# Altium PCB board1.PcbDoc
Units mil, origin at the board's own origin, x right, y up, seen from the top; angles counter-clockwise.
Board outline 3500 x 2000 mil, 2 copper layers (Top Layer, Bottom Layer), stack 61.756 mil thick; 22 components, 12 nets, 57 pads, 12 vias.
Unrouted connection lines stored in the file: 12.
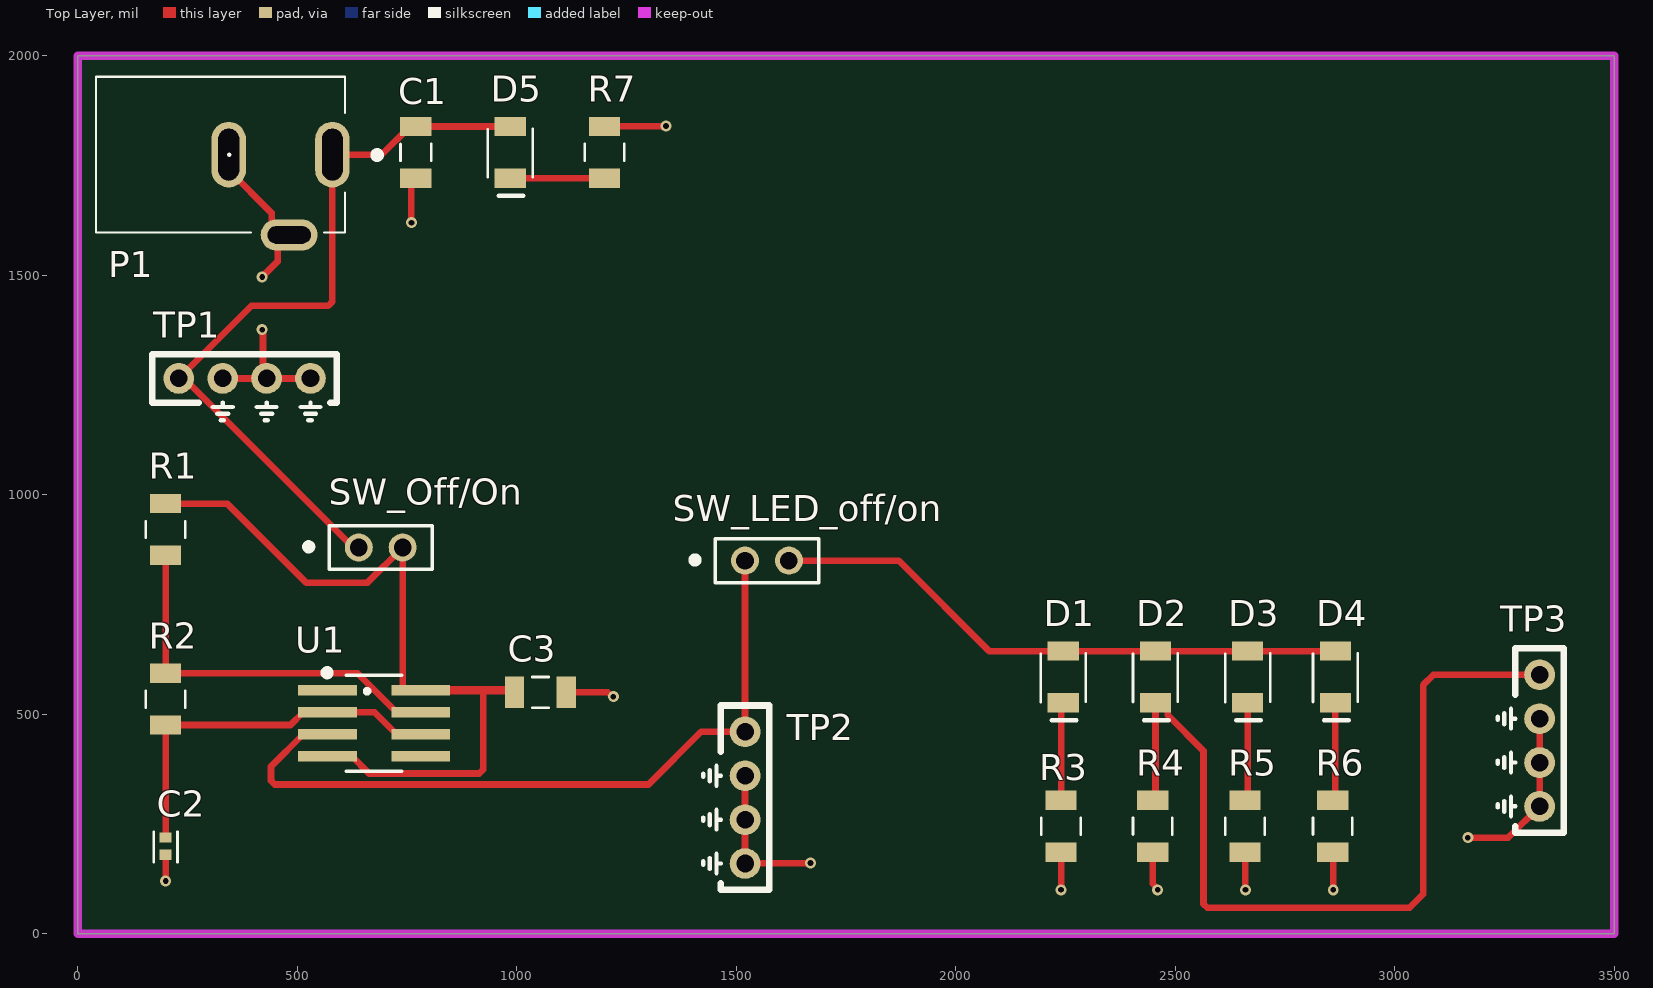
[diagram p0: Top Layer view]
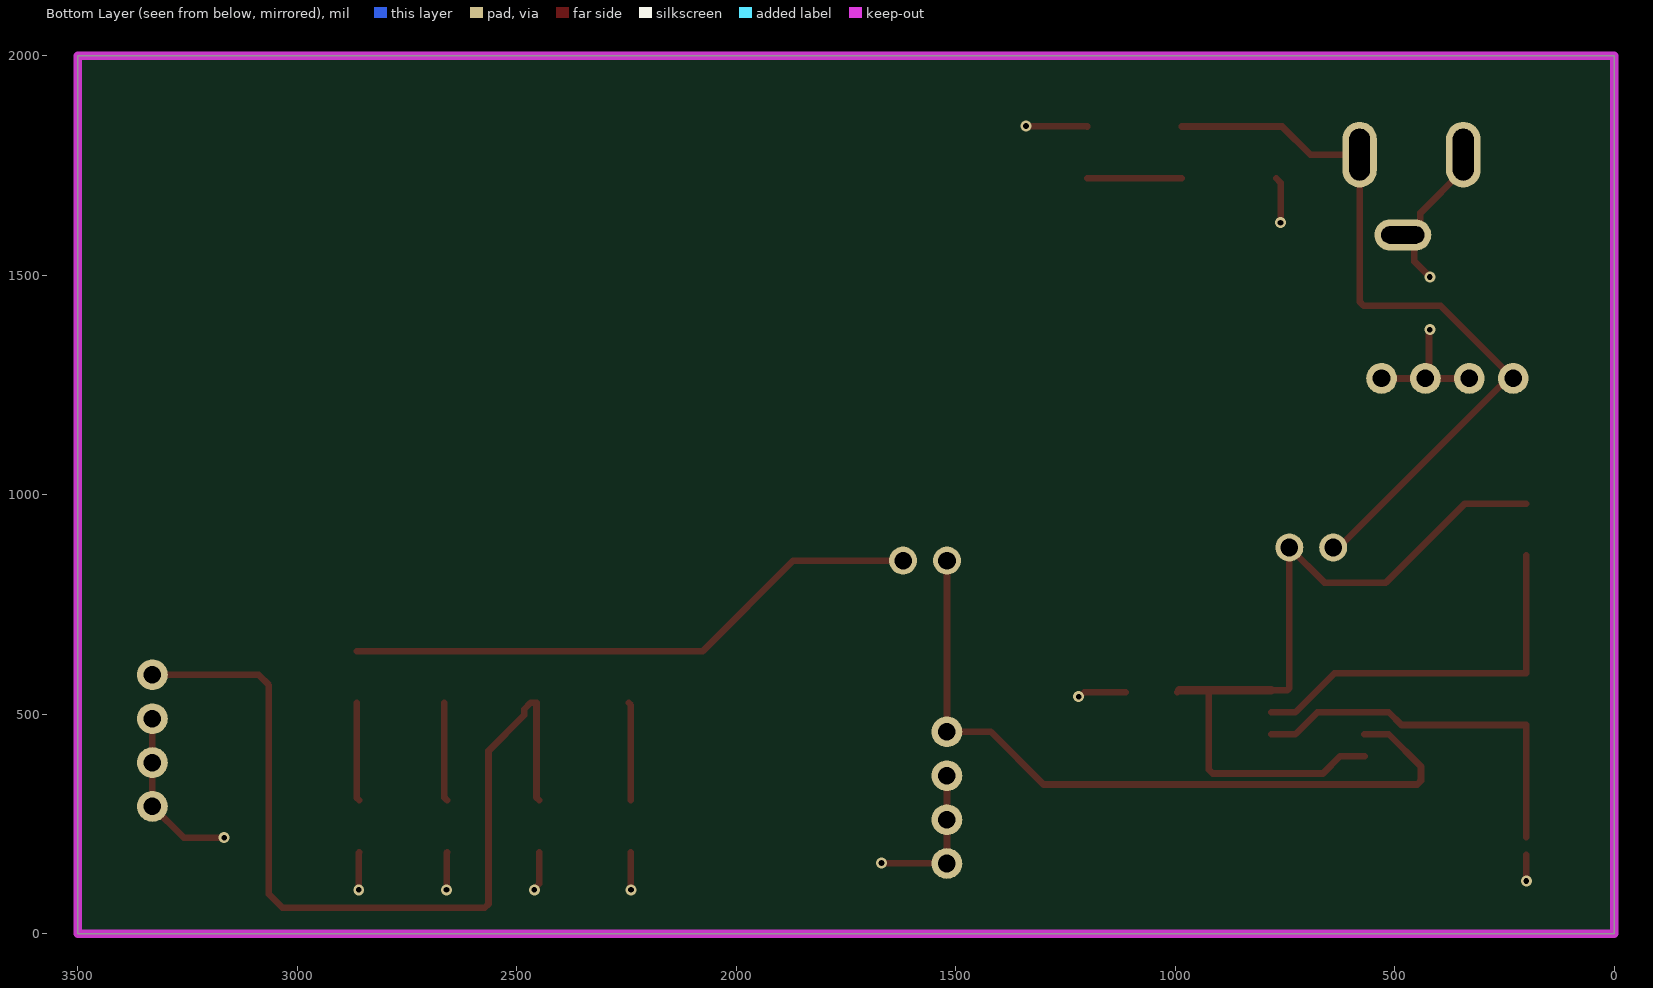
[diagram p1: Bottom Layer view, seen from below]
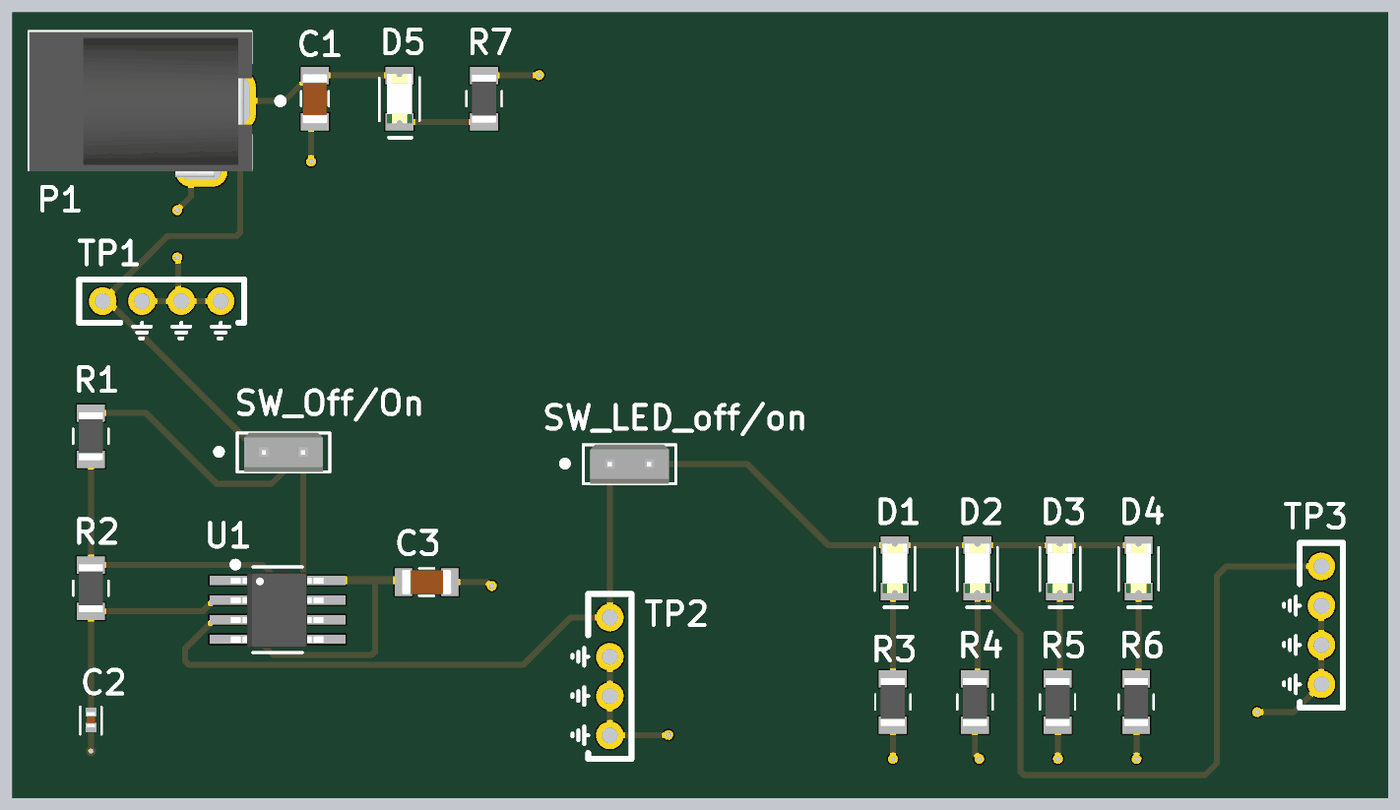
[diagram p2: 3D render of the assembled board from above, using the file's embedded part models]

## Layer stack, top to bottom
Top Solder: solder mask 1, SM-001, Dk 4
Top Layer: signal copper 1.378
Dielectric 1: core 59, Core-043, Dk 4.3
Bottom Layer: signal copper 1.378
Bottom Solder: solder mask 1, SM-001, Dk 4

## Board outline
0,0 3500,0 3500,2000 0,2000

## Design rules (kind name [scope] priority, off if disabled: settings)
Clearance [All] p1: gap=10 ignorepadtopadclearanceinfootprint=FALSE
PlaneClearance [All] p1: clearance=10
PlaneConnect [All] p1: planeconnectstyle=Direct reliefexpansion=20 reliefentries=4 reliefconductorwidth=10 reliefairgap=10
PolygonConnect [All] p1: connectstyle=Direct reliefconductorwidth=10 reliefentries=4 polygonreliefangle="90 Angle" airgapwidth=10
RoutingVias [All] p1: holewidth=13 width=25 viastyle="Through Hole" minholewidth=13 minwidth=25 maxholewidth=60 maxwidth=80
SolderMaskExpansion [All] p1: expansion=4 istentingtop=FALSE
SupplyNets "Schematic Supply Nets_1" [InNet('GND')] p1: voltage=0.000
SupplyNets "Schematic Supply Nets" [InNet('+5')] p2: voltage=0.000
UnRoutedNet [All] p1: checkbadconnections=TRUE
Width "Schematic Width Constraint_1" [InNet('555_5v')] p1: maxlimit=100 minlimit=10 preferedwidth=20 minimp=50.000000 maximp=50.000000 favimp=50.000000
Width "Schematic Width Constraint" [InNet('+5')] p2: maxlimit=100 minlimit=10 preferedwidth=20 minimp=50.000000 maximp=50.000000 favimp=50.000000
Width [All] p3: maxlimit=100 minlimit=6 preferedwidth=6 minimp=50.000000 maximp=50.000000 favimp=50.000000
27 further rules are at their usual default settings.

## Components (designator, comment, footprint, x,y, rotation, side; value= is the part's Value field where it differs from the comment)
C1 "22uF" 1206_Passive_Capacitor 770,1780 r270 top
C2 "1uF" 0402_Passive_Capacitor 200,199.69 r270 top
C3 "22uF" 1206_Passive_Capacitor 1054,550 r0 top
D1 "" LED_1206 2245,585 r270 top
D2 "" LED_1206 2455,585 r270 top
D3 "" LED_1206 2665,585 r270 top
D4 "Red" LED_1206 2865,585 r270 top
D5 "Red" LED_1206 985,1780 r270 top
P1 "Power Jack" Power_Jack 580,1775 r180 top value="CONN PWR JACK 2X5.5MM SOLDER"
R1 "1k" 1206_Passive_Resitor 200,921 r90 top value=1K
R2 "1k" 1206_Passive_Resitor 200,534.5 r90 top value=1K
R3 "1M" 1206_Passive_Resitor 2240,245 r270 top value=10K
R4 "1k" 1206_Passive_Resitor 2448.7,245 r270 top value=1K
R5 "300 Ohm" 1206_Passive_Resitor 2658.7,245 r270 top value=300
R6 "1k" 1206_Passive_Resitor 2858.7,245 r270 top value=50
R7 "1k" 1206_Passive_Resitor 1200,1780 r270 top value="1K Ohm"
SW_LED_off/on "SW_2Pin_100mil_Switch" 2Pin-Header-Conn 1520,850 r0 top (schematic designator SW_555_LED_off/on)
SW_Off/On "SW_2Pin_100mil_Switch" 2Pin-Header-Conn 640,879.93 r0 top (schematic designator SW_555_Off/On)
TP1 "TP_5V" TP10x_Probe 380,1265 r0 top
TP2 "TP_555_Output" TP10x_Probe 1520,310 r270 top
TP3 "TP_LED_Current" TP10x_Probe 3330,440 r270 top
U1 "fast_555" TS555IDTTR 675,479.58 r0 top

## Footprints (in the part's own frame and the unit in brackets; to place one, negate y for a bottom-side part, rotate by r counter-clockwise, add the part's x,y. Pads: shape width x height; smd on the part's side, far side on the other; paste and mask are expansions set on the pad)
2Pin-Header-Conn [mm]
  round 1.62 hole 1.02: 1(0,0) 2(2.54,0)
  silkscreen extent -3.02,-1.27 4.26,1.26, body extent -1.27,-1.27 3.81,1.27, height 8.13
0402_Passive_Capacitor [mm] "Reference: https://www.worthingtonassembly.com/perfect-0402-footprint"
  rect 0.6x0.7 smd mask+0: 1(-0.5,0) 2(0.5,0)
  silkscreen extent -0.84,-0.69 0.94,0.69, body extent -0.5,-0.27 0.5,0.28, height 0.5
1206_Passive_Capacitor [mil]
  rect 44x71 smd: 1(-59,0) 2(59,0)
  silkscreen extent -19,-35 19,35, body extent -63,-31 63,32, height 50
1206_Passive_Resitor [mil]
  rect 44x71 smd: 1(-59,0) 2(59,0)
  silkscreen extent -19,-45 19,45, body extent -61,-31 61,31, height 26
LED_1206 [mil]
  rect 44x71 smd: 1(-59,0) 2(59,0)
  silkscreen extent -54,-51 99,51, body extent -63,-31 63,31, height 28
Power_Jack [mm]
  oval 2x3.8 hole 1.2 slot 3 at 90 deg: 1(0,0) 2(6,0)
  oval 3.3x1.8 hole 1 slot 2.5 at 0 deg: 3(2.5,4.65)
  silkscreen extent -2.79,-4.5 13.68,4.5, body extent -0.76,-4.45 13.64,4.95, height 11.49
TP10x_Probe [mil] "Small Probs footprint"
  round 70 hole 40: 1(-150,0) 2(-50,0) 2(50,0) 2(150,0)
  silkscreen extent -210,-95 210,55
TS555IDTTR [mm] "IC OSC Single Timer 2.7MHz 8SOIC"
  rect 3.4x0.6 smd: 1(-2.7,1.905) 2(-2.7,0.635) 3(-2.7,-0.635) 4(-2.7,-1.905) 5(2.7,-1.905) 6(2.7,-0.635) 7(2.7,0.635) 8(2.7,1.905)
  silkscreen extent -2.85,-2.77 1.6,3.05, body extent -3.03,-2.48 2.96,2.43, height 1.75

## Part data
C1 C3: library part C_22uF_1206, "22uF ±10% 25V X5R 1206 Multilayer Ceramic Capacitors MLCC - SMD/SMT RoHS", LCSC Part#=C12891, MFR Part #=CL31A226KAHNNNE, Datasheet=https://datasheet.lcsc.com/lcsc/1811031514_Samsung-Electro-Mechanics-CL31A226KAHNNNE_C12891.pdf, Type=basic
C2: library part C_1uF_0402, "MULTILAYER CERAMIC CAPACITORS MLCC - SMD/SMT 1UF 25V 0402 ROHS", LCSC Part#=C52923, MFR Part #=CL05A105KA5NQNC, Datasheet=https://datasheet.lcsc.com/szlcsc/Samsung-Electro-Mechanics-CL05A105KA5NQNC_C52923.pdf, Type=Basic
D1 D2 D3 D4 D5: library part LED_RED_1206, "Red 621~631nm 1206 Light Emitting Diodes (LED) RoHS", LCSC Part#=C93133, MFR Part #=15-21/R6C-FQ1R1B/2T, Datasheet=https://datasheet.lcsc.com/szlcsc/1811151241_Everlight-Elec-15-21-R6C-FQ1R1B-2T_C93133.pdf, Type=Extended
P1: library part "P_Power Jack", "Power Barrel Connector Jack 2.10mm ID (0.083\"), 5.50mm OD (0.217\") Through Hole, Right Angle", LCSC Part#=C136744, MFR Part #=PJ-102A, Digikey Link=https://www.digikey.com/product-detail/en/PJ-102A/CP-102A-ND/275425/?itemSeq=304982367, Type=Extended
R1 R2 R4 R6 R7: library part R_1K_1206, "CHIP RESISTOR - SURFACE MOUNT 1KOHMS ±1% 1/4W 1206 ROHS", LCSC Part#=C4410, MFR Part #=RNCP1206FTD1K00CT, Digikey Link=https://www.digikey.com/product-detail/en/RNCP1206FTD1K00/RNCP1206FTD1K00CT-ND/2240675/?itemSeq=304982373, Type=Basic
R3: library part R_1M_1206, "CHIP RESISTOR - SURFACE MOUNT 1MOHMS ±1% 1/4W 1206 ROHS", LCSC Part#=C17927, MFR Part #=RMCF1206JT1M00, Digikey Link=https://www.digikey.com/product-detail/en/RMCF1206JT1M00/RMCF1206JT1M00CT-ND/1942830/?itemSeq=304982358, Type=Basic
R5: library part R_300Ohm_1206, "CHIP RESISTOR - SURFACE MOUNT 300OHMS ±1% 1/4W 1206 ROHS", LCSC Part#=C17887, MFR Part #=1206W4F3000T5E, Datasheet=https://datasheet.lcsc.com/szlcsc/Uniroyal-Elec-1206W4F3000T5E_C17887.pdf, Type=Basic
SW_LED_off/on SW_Off/On: "2Pin Header", LCSC Part#=C124375, Type=Extended
TP1 TP2 TP3: library part TP_10x_Probe, "Test Point 300 mil centers"
U1: library part U_555_Fast, "555 Type, Timer/Oscillator _Single_ IC 3MHz 8-SO", LCSC Part#=C90760, MFR Part #=LMC555CMX/NOPB, Package=SOIC-8, Digikey Link=https://www.digikey.com/product-detail/en/texas-instruments/LMC555CMX-NOPB/LMC555CMX-NOPBCT-ND/1010550, Type=Extended

## Via types
v1: diameter 25/25 (per signal layer), hole 13, Top Layer to Bottom Layer, 11 vias
v2: diameter 25, hole 13, Top Layer to Bottom Layer, 1 vias

## Nets (pads, with @x,y where several pads share a name; then routed paths per layer and width w, separated by ;. In a path a pad name is that pad's centre, name@x,y a point inside that pad or via, vN(x,y) a via of type N, cw(c..) or ccw(c..) an arc to the next point about the centre after c; other vN are vias at no path point)
555_5v: C3.1 R1.2 SW_Off/On.2 U1.4 U1.8 | length 1899.7
  Top Layer w15: R1.2 340,980 520,800 660.07,800 SW_Off/On.2 740,558.89 744.31,554.58 U1.8 897.28,554.58 897.9,553.95 ; U1.4 623.82,404.58 663.4,365 914.5,365 923.29,373.79 923.29,554.58 ; C3.1@990.42,554.58 C3.1
  Top Layer w20: U1.8 923.29,554.58 C3.1@990.42,554.58
555_output: SW_LED_off/on.1 TP2.1 U1.3 | length 1714.7
  Top Layer w15: U1.3 513.58,454.58 440,381 440,348.79 448.79,340 1300,340 1420,460 TP2.1 SW_LED_off/on.1
+5: C1.1 D5.1 P1.1 SW_Off/On.1 TP1.1 | length 1758.5
  Top Layer w15: SW_Off/On.1 627.53,879.93 242.47,1265 TP1.1 395.75,1430.75 570.75,1430.75 580,1440 P1.1 692.5,1775 756.5,1839 C1.1 D5.1
GND: C1.2 C2.2 C3.2 P1.2 P1.3 R3.2 R4.2 R5.2 R6.2 R7.1 TP1.2 TP2.2 TP3.2 U1.1 | length 2183.1
  Top Layer w15: v2(200,120) C2.2 ; TP1.2@330,1265 TP1.2@430,1265 ; P1.2 343.78,1739.57 441.36,1641.99 441.36,1617.74 467.16,1591.93 P1.3 480.8,1591.93 455,1566.12 455,1531.29 v1(419.89,1496.19) ; v1(419.89,1376.19) 421.81,1374.27 421.81,1273.19 TP1.2@430,1265 ; TP1.2@530,1265 TP1.2@430,1265 ; v1(760,1620) 760,1711 C1.2 ; C3.2 1207.29,550 1217.29,540 v1(1220,540) ; R7.1 1200.5,1839.5 1339.5,1839.5 v1(1340,1840) ; TP2.2@1520,160 1540,160 1520,180 TP2.2@1520,360 ; TP2.2@1540,160.48 1668.57,160.48 v1(1669.05,160.96) ; v1(2240,100) R3.2 ; R4.2 2448.7,114.01 2460,102.71 v1(2460,100) ; R5.2 2660,184.7 v1(2660,100) ; R6.2 2860,184.7 v1(2860,100) ; v1(3166.61,218.9) 3258.9,218.9 TP3.2@3330,290 ; TP3.2@3330,490 3330,390 3330,315.41 3332,313.41 TP3.2@3335.16,313.41
NetC2_1: C2.1 R2.1 U1.2 U1.6 | length 870.2
  Top Layer w15: C2.1 R2.1 484.5,475.5 513.58,504.58 U1.2 676.18,504.58 726.18,454.58 U1.6
NetD1_1: D1.1 D2.1 D3.1 D4.1 SW_LED_off/on.2 | length 1330.3
  Top Layer w15: SW_LED_off/on.2 1870,850 2076,644 D1.1 D2.1 D3.1 D4.1
NetD1_2: D1.2 R3.1 | length 224.1
  Top Layer w15: R3.1 2240,521 D1.2
NetD2_2: D2.2 R4.1 TP3.1 | length 2018.3
  Top Layer w15: R4.1 2455,310.3 D2.2 2468.5,526 2483,511.5 2483,498 2564.38,416.62 2564.38,67.84 2573.17,59.05 3033.69,59.05 3064.69,90.06 3064.69,566.4 3088.29,590 TP3.1 TP3.1@3320,580
NetD3_2: D3.2 R5.1 | length 224.6
  Top Layer w15: R5.1 2665,310.3 D3.2
NetD4_2: D4.2 R6.1 | length 224.6
  Top Layer w15: R6.1 2865,310.3 D4.2
NetD5_2: D5.2 R7.2 | length 215
  Top Layer w15: D5.2 R7.2
NetR1_1: R1.1 R2.2 U1.7 | length 886.6
  Top Layer w15: R1.1 R2.2 637.26,593.5 726.18,504.58 U1.7
pads on no net: U1.5

## Keep-outs
Keep-Out Layer:
  the board outline again, w20